# Altium PCB PCB1.PcbDoc
Units mil, origin at the board's own origin, x right, y up, seen from the top; angles counter-clockwise.
Board outline 2147.9 x 3817.9 mil, 2 copper layers (Top Layer, Bottom Layer); 6 components, 2 nets, 12 pads, 4 vias.
Unrouted connection lines stored in the file: 2.
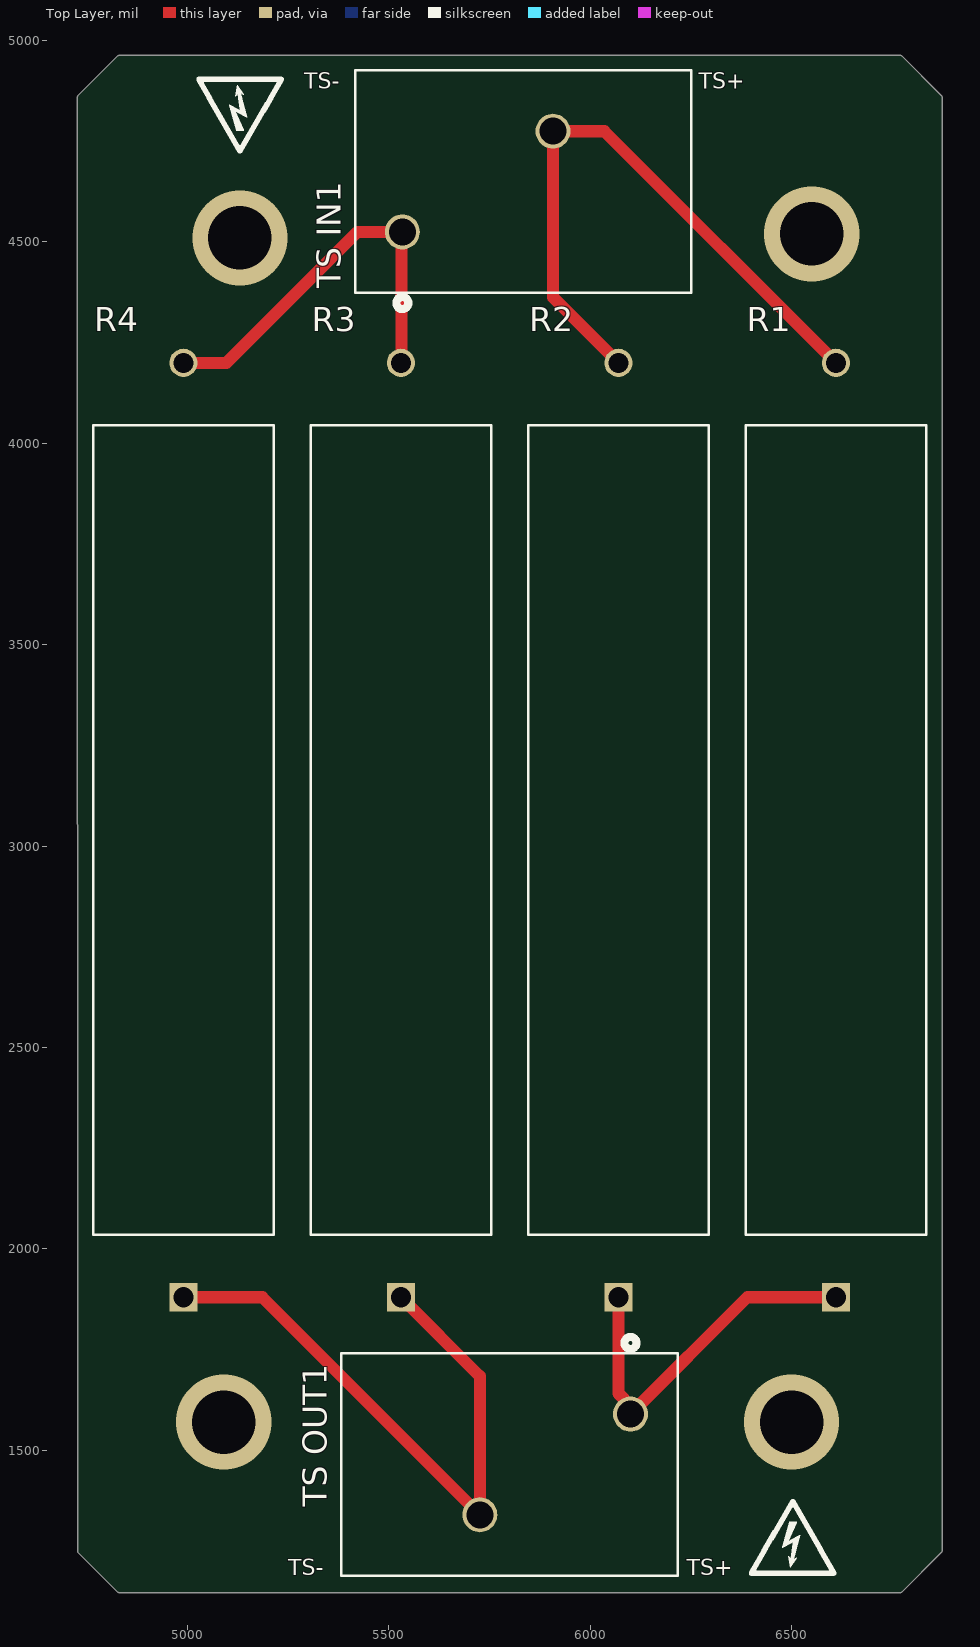
[diagram p0: Top Layer view]
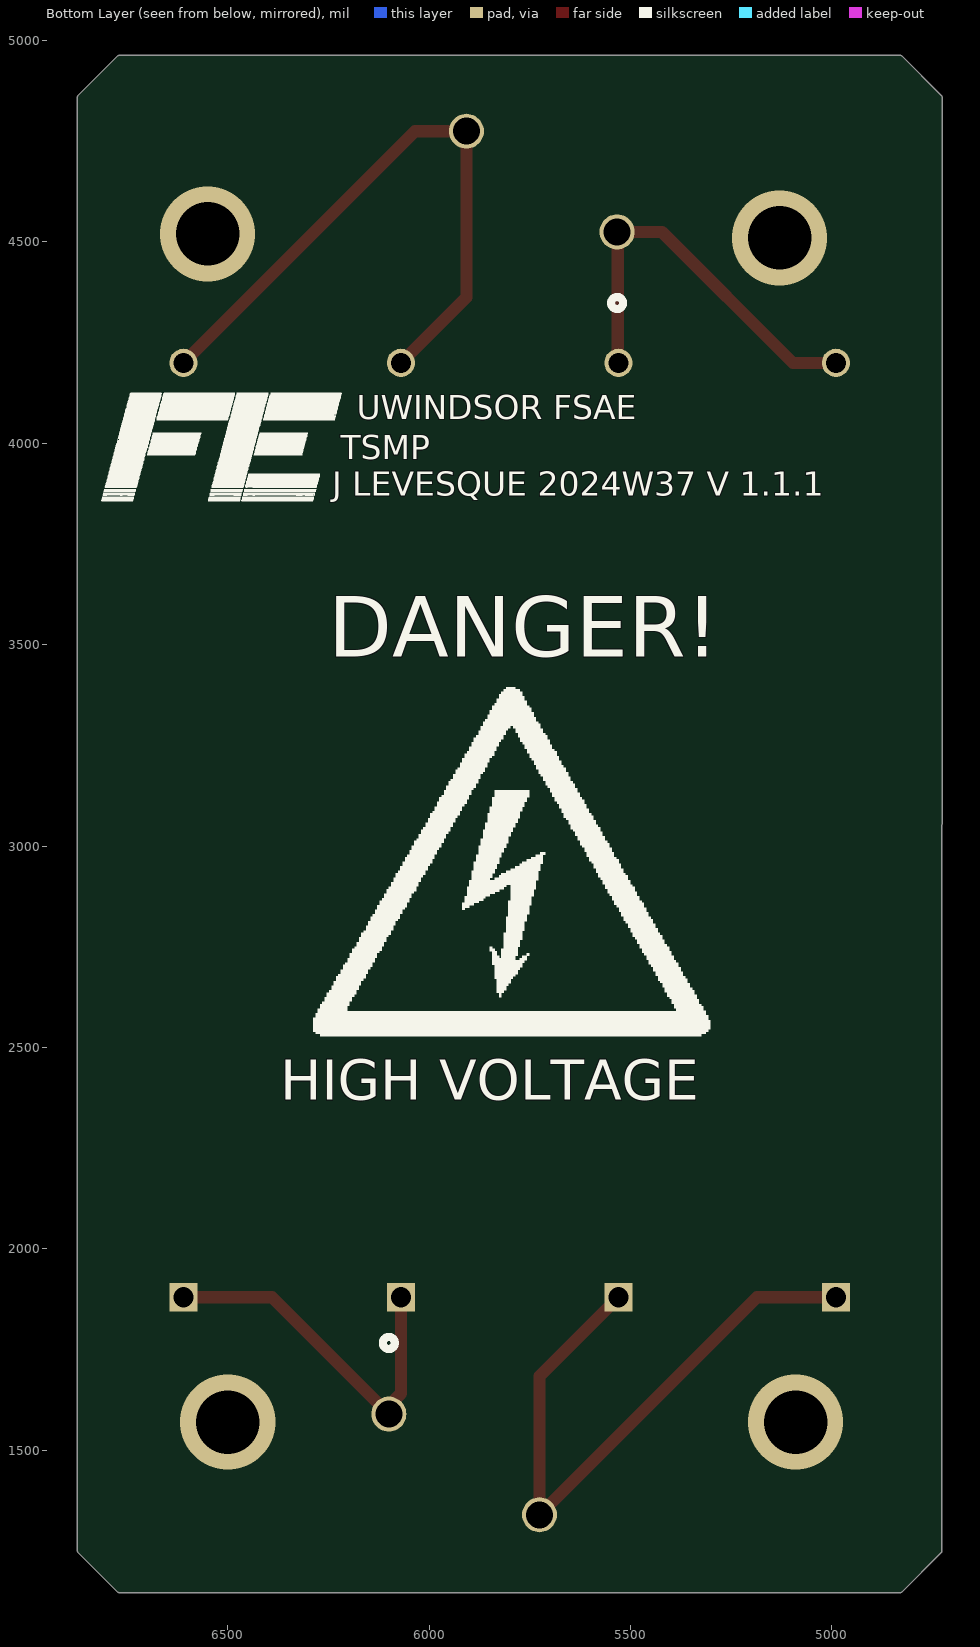
[diagram p1: Bottom Layer view, seen from below]
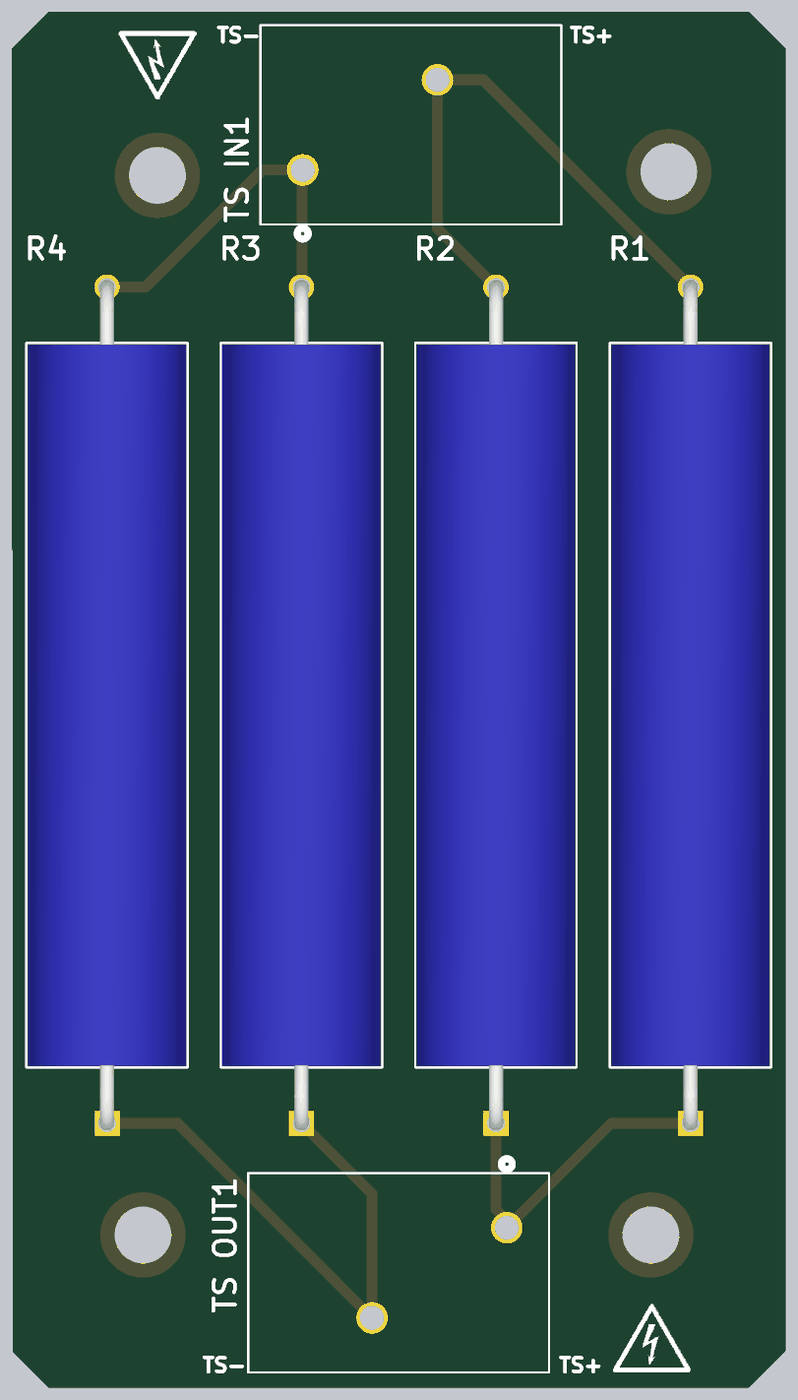
[diagram p2: 3D render of the assembled board from above, using the file's embedded part models]

## Layer stack, top to bottom
Top Solder: solder mask 0.4, Solder Resist, Dk 3.5
Top Layer: signal copper 1.4
Dielectric 1: dielectric 12.6, FR-4, Dk 4.8
Bottom Layer: signal copper 1.4
Bottom Solder: solder mask 0.4, Solder Resist, Dk 3.5

## Board outline
4727.21,1247.21 4827.21,1147.21 4830,1146.05 6770,1146.05 6772.79,1147.21 6872.79,1247.21 6873.95,1250 6873.95,4860 6872.79,4862.79 6772.79,4962.79 6770,4963.95 4830,4963.95 4827.21,4962.79 4727.21,4862.79 4726.05,4860

## Design rules (kind name [scope] priority, off if disabled: settings)
Clearance [All] p1: gap=10 ignorepadtopadclearanceinfootprint=FALSE
PolygonConnect [All] p1: connectstyle=Relief reliefconductorwidth=10 reliefentries=4 polygonreliefangle="90 Angle" airgapwidth=10
RoutingVias [All] p1: holewidth=28 width=50 viastyle="Through Hole" minholewidth=28 minwidth=50 maxholewidth=28 maxwidth=50
SolderMaskExpansion [All] p1: expansion=4 istentingtop=FALSE
SupplyNets "Schematic Supply Nets_1" [InNet('TS+')] p1: voltage=0.000
SupplyNets "Schematic Supply Nets" [InNet('TS-')] p2: voltage=0.000
Width [All] p1: maxlimit=10 minlimit=10 preferedwidth=10
30 further rules are at their usual default settings.

## Classes and differential pairs
component class Sheet1: R1 R2 R3 R4 "TS IN1"

## Components (designator, comment, footprint, x,y, rotation, side; value= is the part's Value field where it differs from the comment)
R1 "B20J30KE" RES_B20_OHM 6610,1880 r90 top
R2 "B20J30KE" RES_B20_OHM 6070,1880 r90 top
R3 "B20J30KE" RES_B20_OHM 5530,1880 r90 top
R4 "B20J30KE" RES_B20_OHM 4990,1880 r90 top
"TS IN1" "1017514" CONN_1017514 5533.43,4525 r90 top
"TS OUT1" "1017514" CONN_1017514 6100,1590 r270 top

## Footprints (in the part's own frame and the unit in brackets; to place one, negate y for a bottom-side part, rotate by r counter-clockwise, add the part's x,y. Pads: shape width x height; smd on the part's side, far side on the other; paste and mask are expansions set on the pad)
CONN_1017514 [mil]
  round 87 / inner round 60 / far side round 87 hole 67 paste-99999 mask+0: 1(0,0) 2(250,-374.02)
  silkscreen extent -191,-718 402,117
RES_B20_OHM [mil]
  rect 70x70 / inner round 60 / far side rect 70x70 hole 50 paste-99999 mask+0: 1(0,0)
  round 70 / inner round 60 / far side round 70 hole 50 paste-99999 mask+0: 2(2320,0)
  silkscreen extent 155,-224 2165,224, body extent -20,-219 2340,219, height 437

## Part data
R1 R2 R3 R4: "No Description Available", Mfr_Name=Ohmite
"TS IN1" "TS OUT1": library part CMP-002-00077-5, "Barrier Strip Terminal Block", RoHS Compliant=Yes

## Via types
v1: diameter 236.22, hole 157.48, Top Layer to Bottom Layer, tented both sides, 4 vias

## Nets (pads, with @x,y where several pads share a name; then routed paths per layer and width w, separated by ;. In a path a pad name is that pad's centre, name@x,y a point inside that pad or via, vN(x,y) a via of type N, cw(c..) or ccw(c..) an arc to the next point about the centre after c; other vN are vias at no path point)
TS+: "TS IN1.2" "TS OUT1.1" R1.1 R1.2 R2.1 R2.2 | length 2515.6
  Top Layer w30: R2.1 6070,1640.84 6100,1610.84 6100,1590 6390,1880 R1.1 ; R2.2 5907.44,4362.56 5907.44,4775 6035,4775 R1.2
TS-: "TS IN1.1" "TS OUT1.2" R3.1 R3.2 R4.1 R4.2 | length 2585.3
  Top Layer w30: R4.1 5185.98,1880 5725.98,1340 5725.98,1684.02 R3.1 ; R4.2 5096.91,4200 5421.91,4525 5533.43,4525 5531.71,4523.29 5531.71,4201.71 R3.2
copper on no net:
  other v1: 5090,1570 6500,1570 5130,4510 6550,4520

## Silkscreen, mask and mechanical layers (free items; w line width, h text height)
Top Overlay:
  drawing of 6 lines, arcs and shapes, not listed
  text "TS-" at 5290,4880 h40
  text "TS+" at 6270,4880 h40
  text "TS-" at 5250,1190 h40
  text "TS+" at 6240,1190 h40
Bottom Overlay:
  drawing of 22 lines, arcs and shapes, not listed
  text "UWINDSOR FSAE" at 6180,4060 h60
  text "TSMP" at 6220,3960 h60
  text "J LEVESQUE 2024W37 V 1.1.1" at 6240,3870 h60
  text "DANGER!" at 6250,3470 h150
  text "HIGH VOLTAGE" at 6370,2370 h100
Top Assembly:
  lines w7.87: 6870,1260 6870,1250 ; 6870,1250 6870,4860 6770,4960 4830,4960 4730,4860 4730,1250 4830,1150 6770,1150 6870,1250